# Altium PCB STM32_PCB.PcbDoc
Units mm, origin at the board's own origin, x right, y up, seen from the top; angles counter-clockwise.
Board outline 46.2 x 39.9 mm, 4 copper layers (L1 (Signal), L2 (GND), L3 (GND), L4 (Signal)), stack 1.57 mm thick; 36 components, 27 nets, 174 pads, 66 vias.
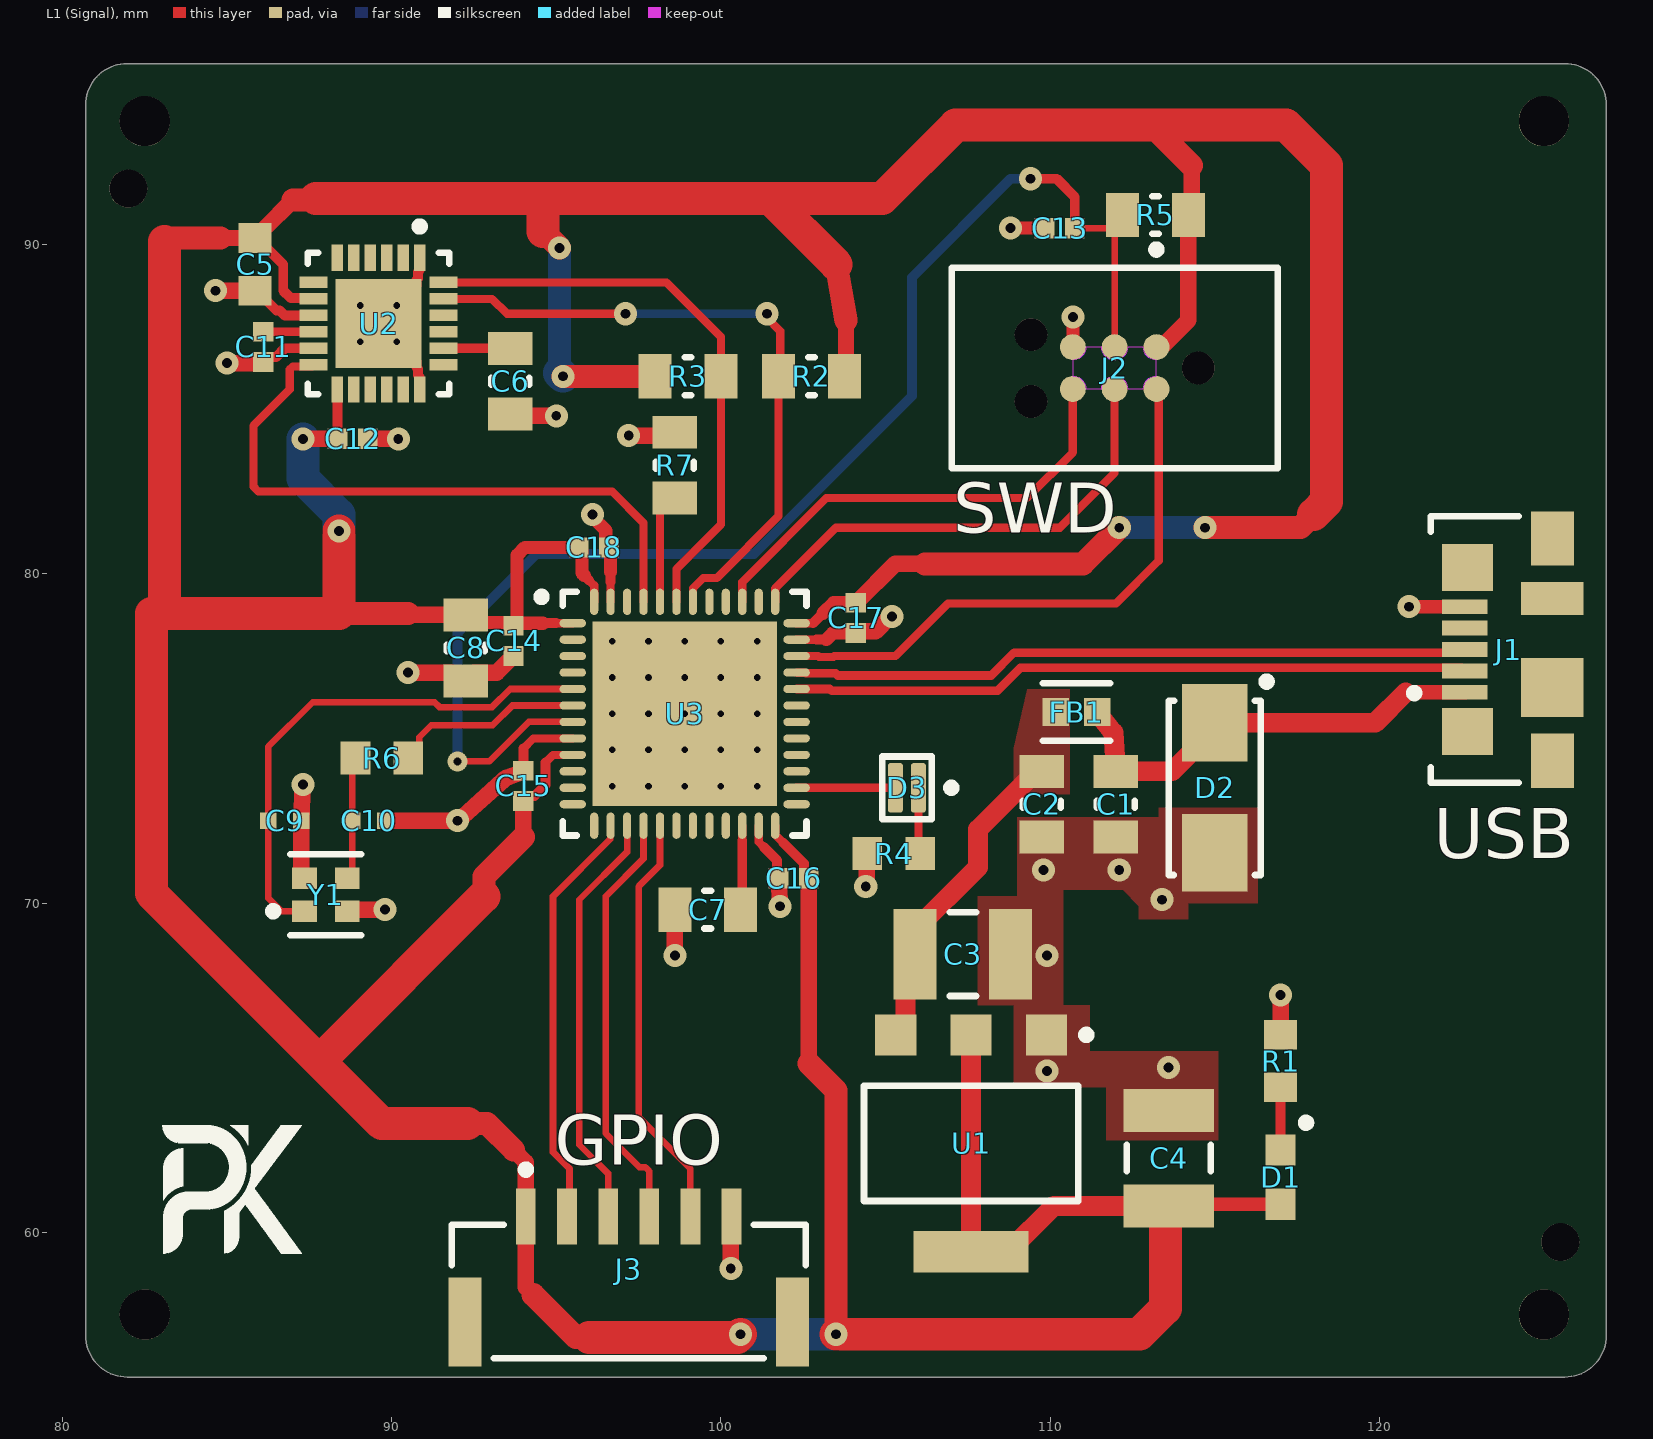
[diagram p0: L1 (Signal) view]
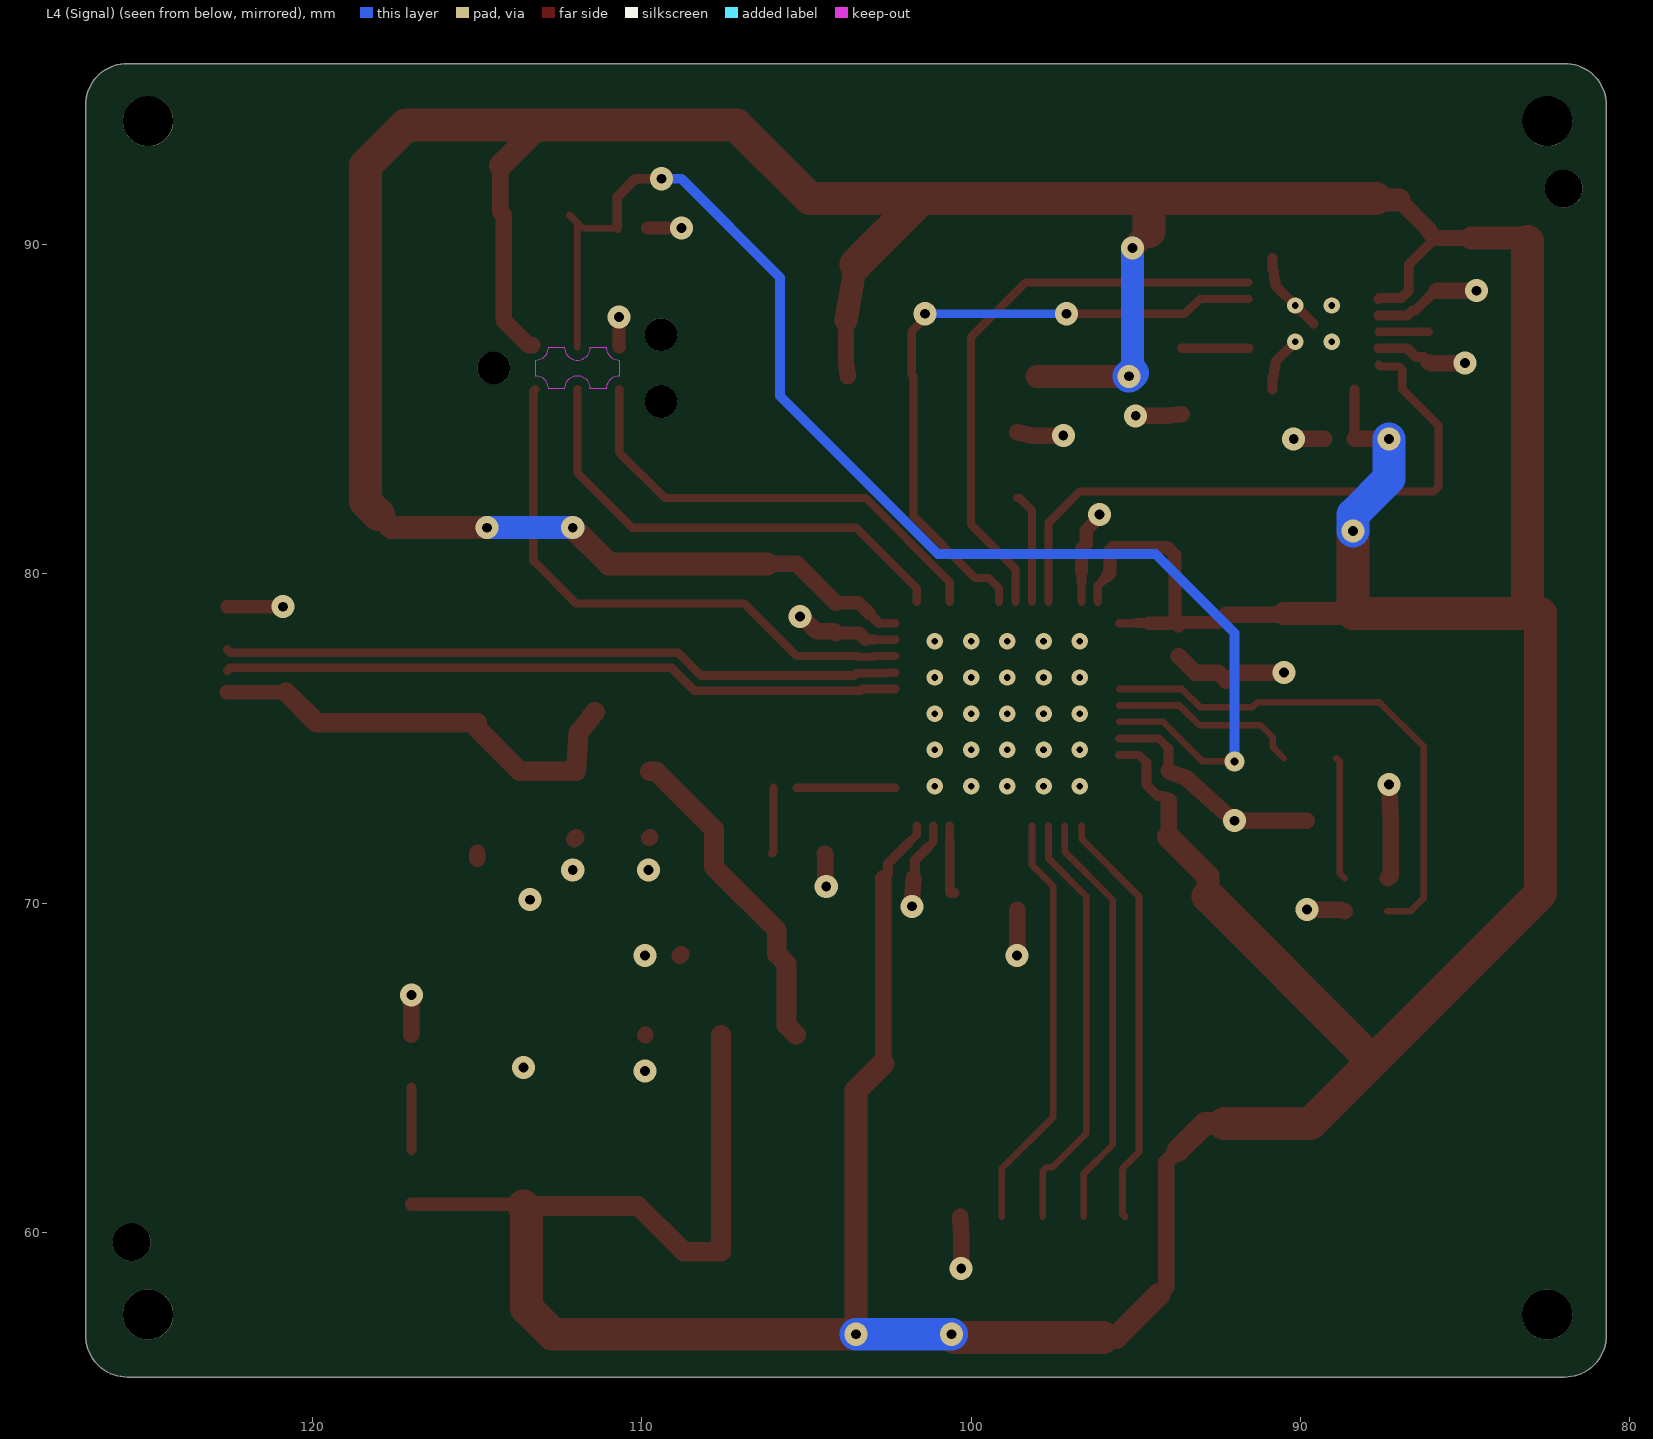
[diagram p1: L4 (Signal) view, seen from below]
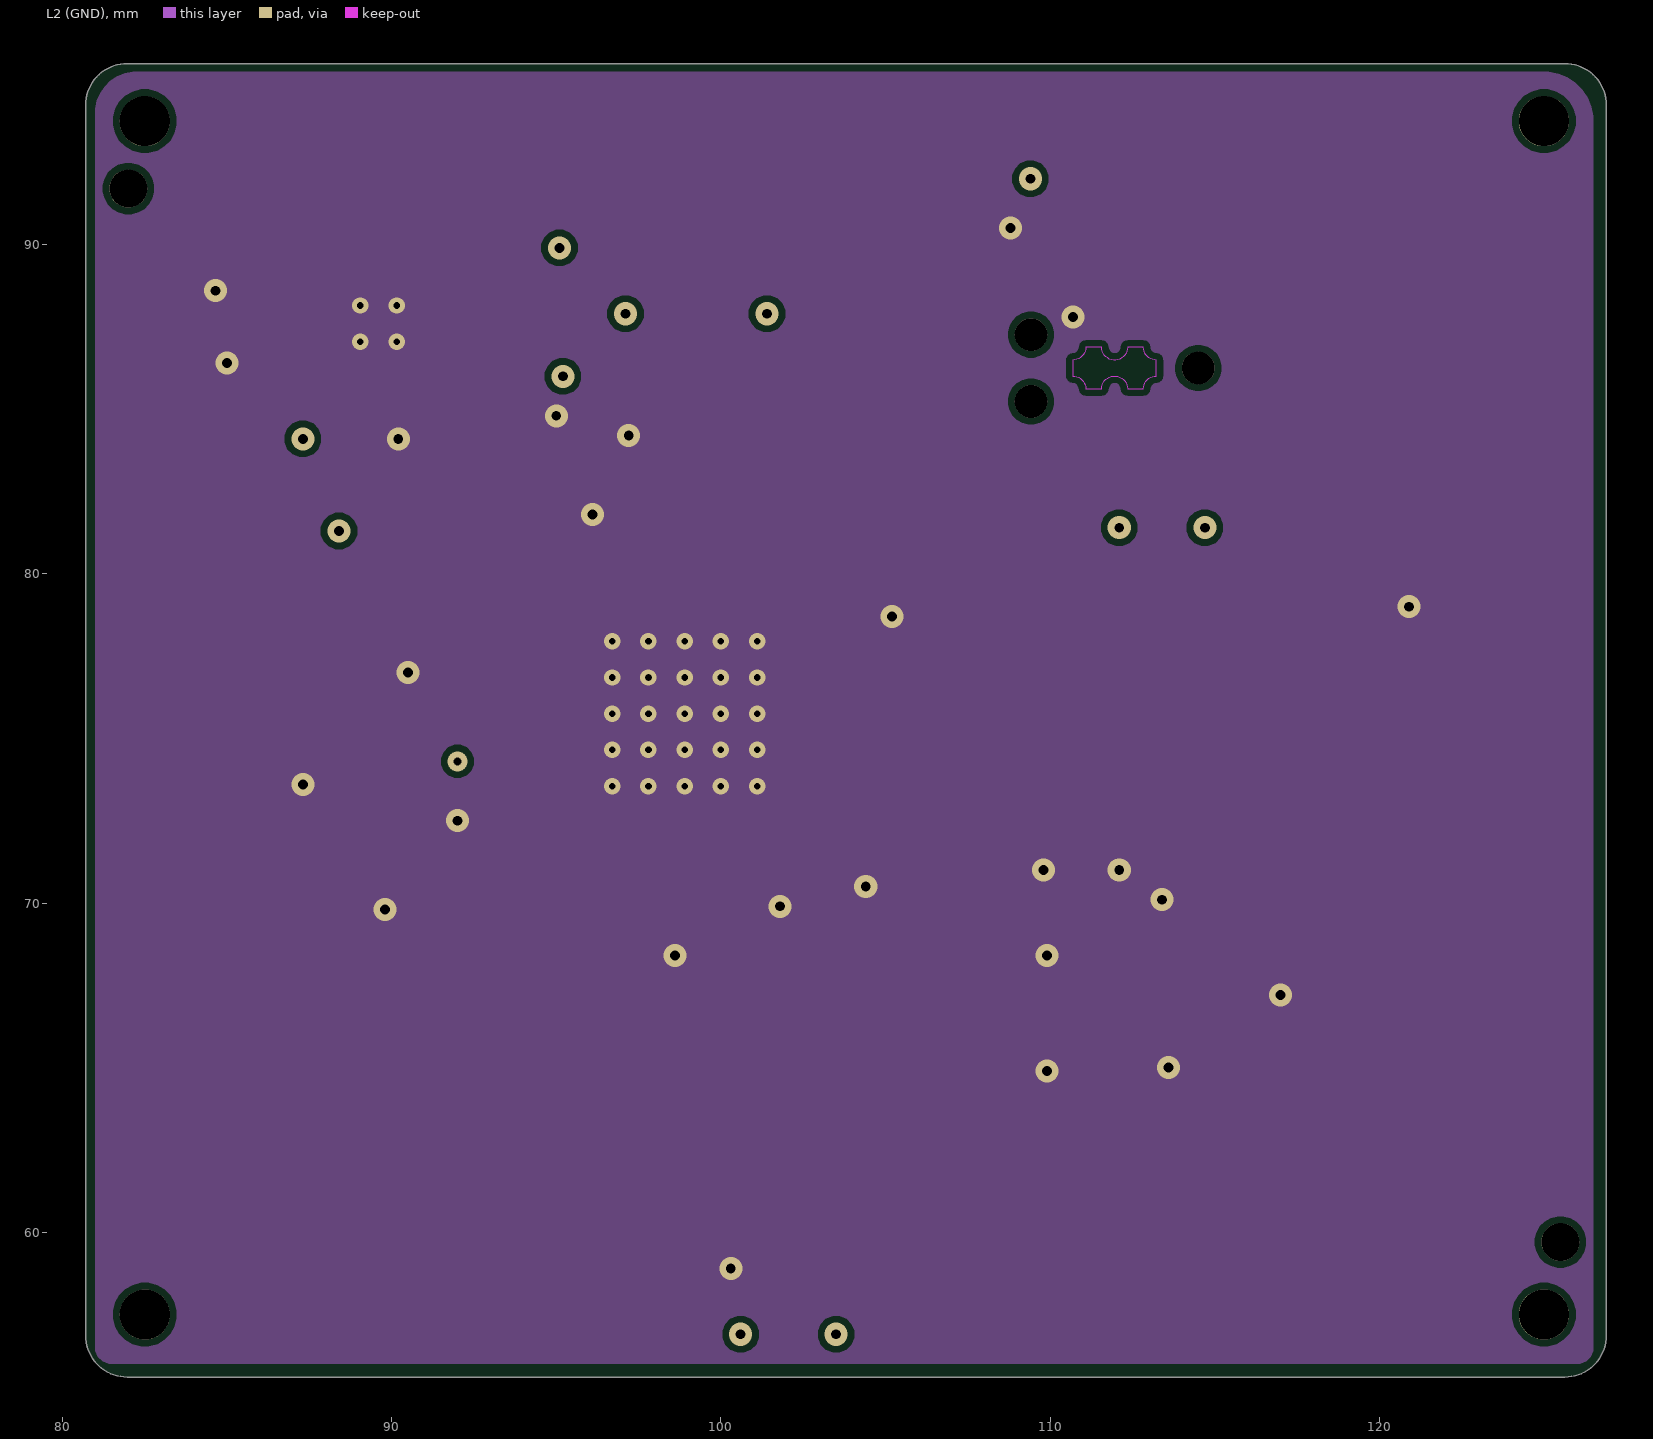
[diagram p2: L2 (GND)]
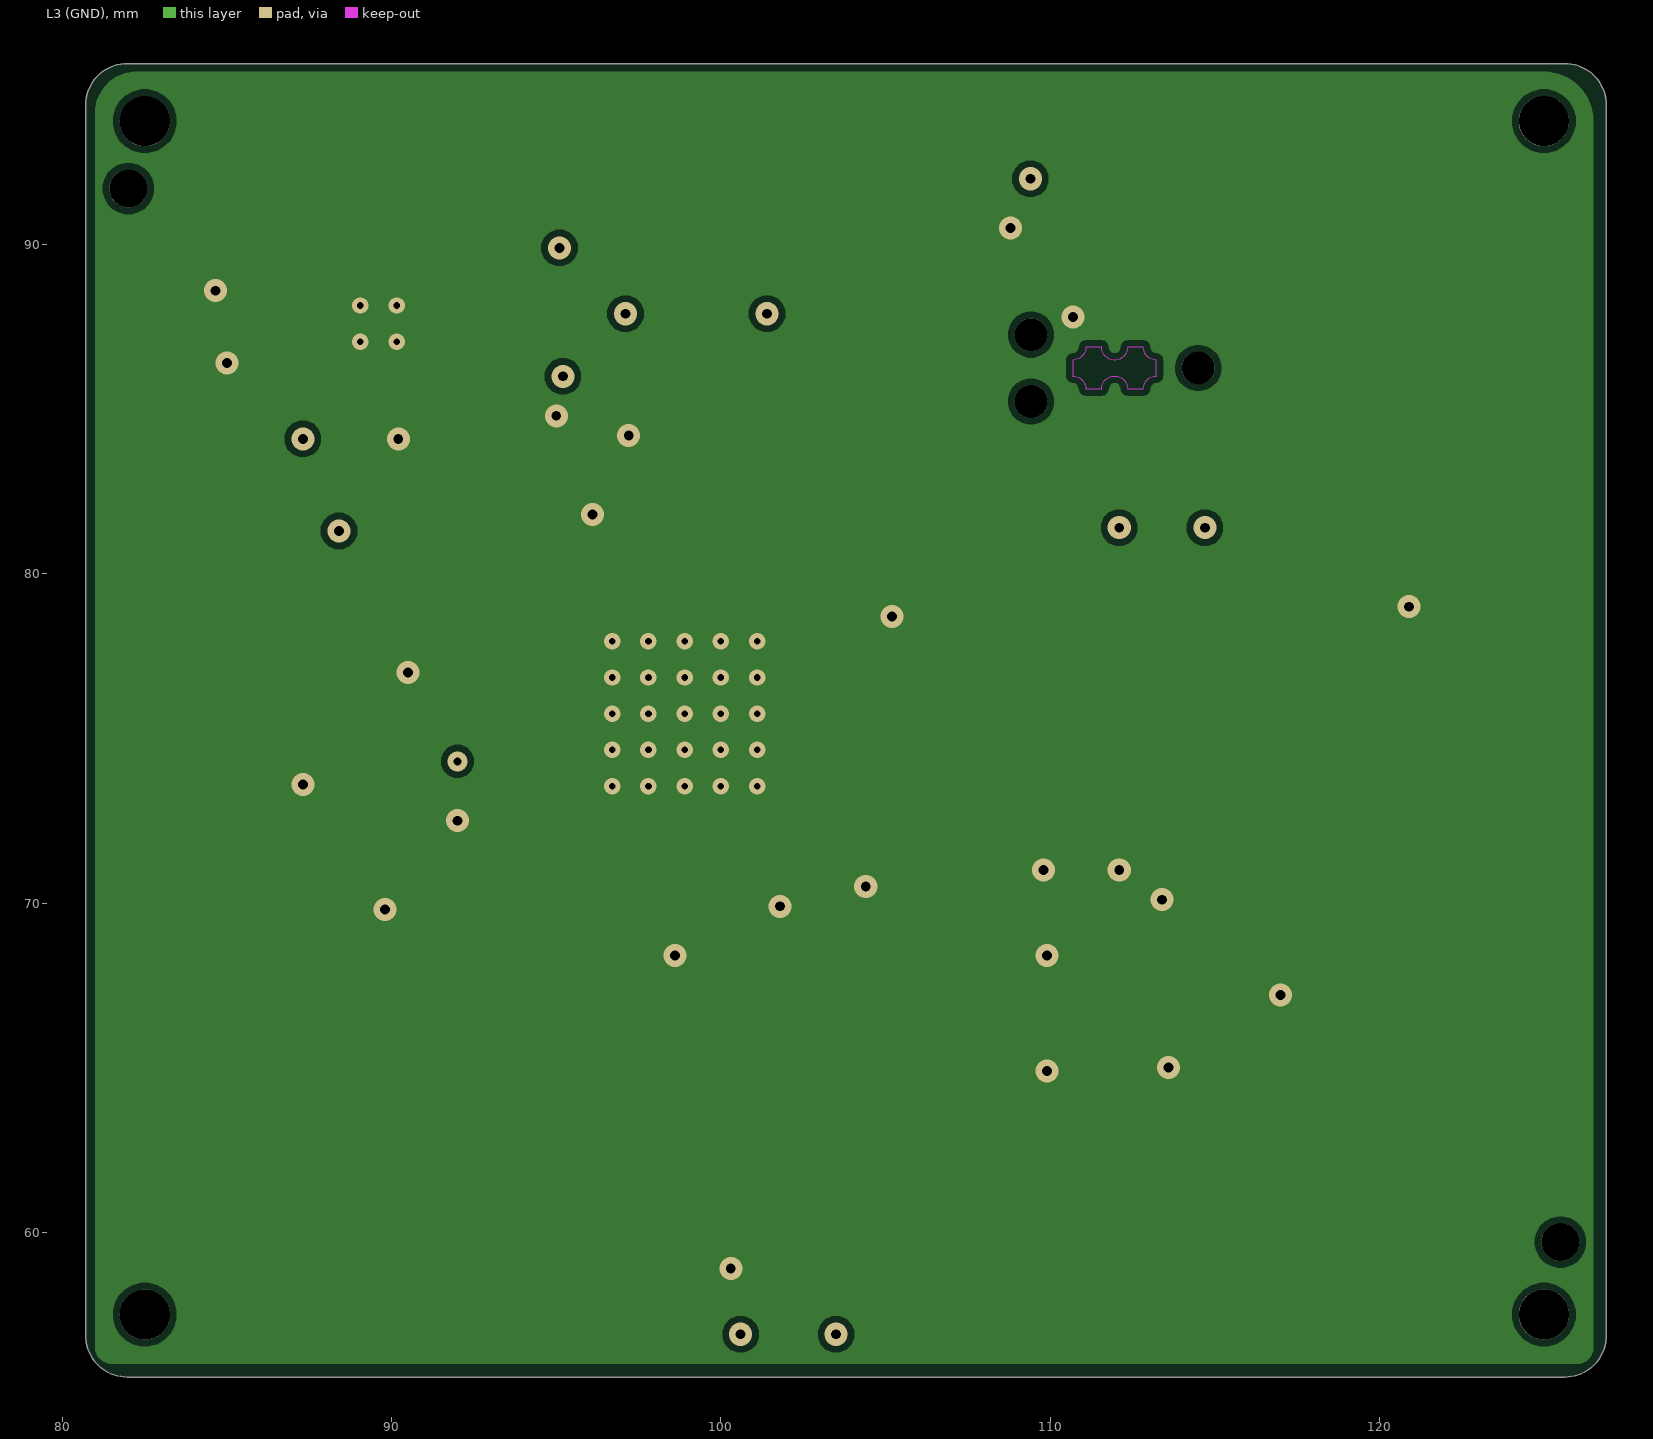
[diagram p3: L3 (GND)]
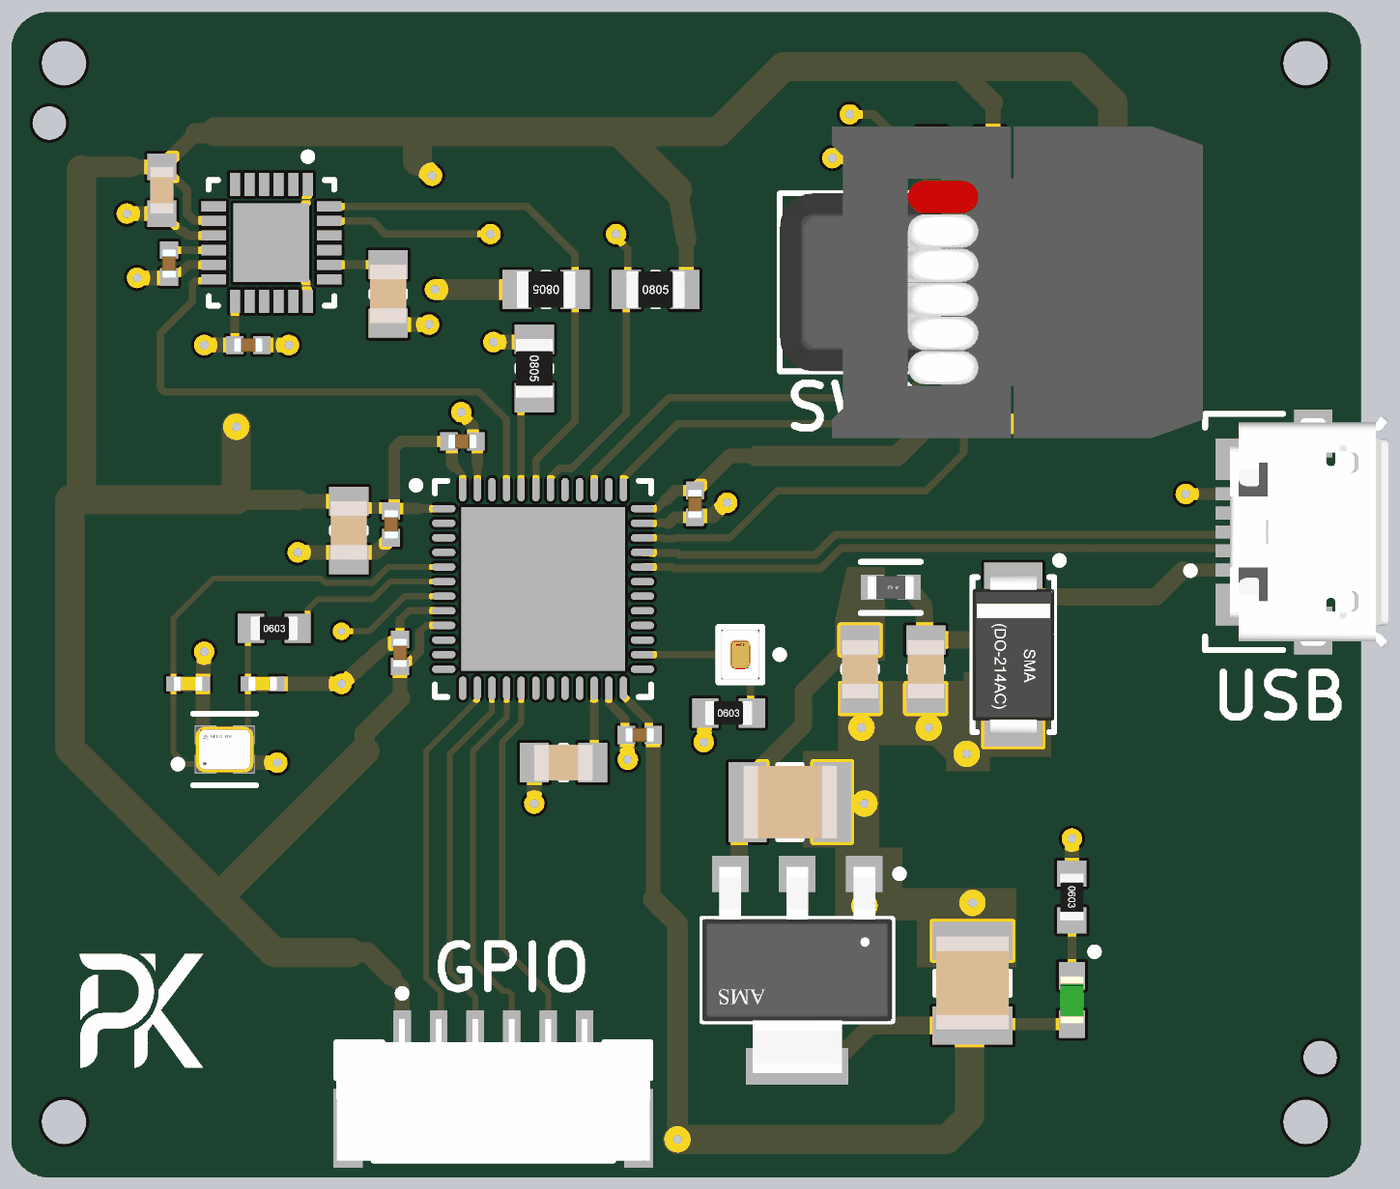
[diagram p4: 3D render of the assembled board from above, using the file's embedded part models]

## Layer stack, top to bottom
Top Solder: solder mask 0.0254, SM-001, Dk 4
L1 (Signal): signal copper 0.035
Dielectric 1: prepreg 0.2, PP-017, Dk 4.6
L2 (GND): signal copper 0.0175
Dielectric 3: core 1.065, Core-039, Dk 4.6
L3 (GND): signal copper 0.0175
Dielectric 5: prepreg 0.2, PP-017, Dk 4.6
L4 (Signal): signal copper 0.035
Bottom Solder: solder mask 0.0254, SM-001, Dk 4

## Board outline
80.7,56.87 80.7,94.23 cw(c81.97,94.23) 81.97,95.5 125.63,95.5 cw(c125.63,94.23) 126.9,94.23 126.9,56.87 cw(c125.63,56.87) 125.63,55.6 81.97,55.6 cw(c81.97,56.87)

## Design rules (kind name [scope] priority, off if disabled: settings)
Clearance [All] p1: gap=0.2 ignorepadtopadclearanceinfootprint=FALSE
DiffPairsRouting [All] p1: maxlimit=0.254 minlimit=0.203 mostfreqgap=0.254 toplayer_maxgap=0.203 toplayer_prefgap=0.203 toplayer_minwidth=0.26 toplayer_maxwidth=0.26 toplayer_prefwidth=0.26 bottomlayer_maxgap=0.203 bottomlayer_prefgap=0.203 bottomlayer_minwidth=0.26 bottomlayer_maxwidth=0.26 bottomlayer_prefwidth=0.26 impedanceprofiledriven=TRUE impedanceprofileid={00F8BFFB-08A5-4590-A4D0-F1D30C82B912} impedanceprofilevalue=90.000000 maxuncoupledlength=12.7
PolygonConnect [All] p1: connectstyle=Direct reliefconductorwidth=0.254 reliefentries=4 polygonreliefangle="90 Angle" airgapwidth=0.254
RoutingVias [All] p1: holewidth=0.3 width=0.7 viastyle="Through Hole" minholewidth=0.25 minwidth=0.55 maxholewidth=0.4 maxwidth=0.9
SolderMaskExpansion [All] p1: expansion=0.102 istentingtop=FALSE
SupplyNets "Schematic Supply Nets_3" [InNet('VBUS')] p1: voltage=0.000
SupplyNets "Schematic Supply Nets_2" [InNet('+3V3')] p2: voltage=0.000
SupplyNets "Schematic Supply Nets_1" [InNet('+5V')] p3: voltage=0.000
SupplyNets "Schematic Supply Nets" [InNet('GND')] p4: voltage=0.000
UnRoutedNet [All] p1: checkbadconnections=TRUE
Width [All] p1: maxlimit=1 minlimit=0.2 preferedwidth=0.3 minimp=50.000000 maximp=50.000000 favimp=50.000000
28 further rules are at their usual default settings.

## Classes and differential pairs
net class USB_DIFF: USB_D_N USB_D_P
differential pair USB_D: +USB_D_P -USB_D_N

## Components (designator, comment, footprint, x,y, rotation, side; value= is the part's Value field where it differs from the comment)
C1 "CC0805ZRY5V7BB225" C_0805 112,73 r90 top value=2.2µF
C2 "CC0805ZRY5V7BB225" C_0805 109.75,73 r90 top value=2.2µF
C3 "CL32A226KOJNNNE" C_1210 107.35,68.45 r180 top value=22µF
C4 "CL32A226KOJNNNE" C_1210 113.6,62.25 r270 top value=22µF
C5 "CC0603KRX7R9BB103" C_0603 85.85,89.4 r90 top value=10nF
C6 "CC0805JKNP09BN222" C_0805 93.6,85.85 r90 top value=2.2nF
C7 "CC0805ZRY5V7BB225" C_0805 99.6,69.8 r0 top value=2.2µF
C8 "CC0805ZRY5V7BB225" C_0805 92.25,77.75 r90 top value=2.2µF
C9 "885392005106" WCAP-CSRF_0402 86.75,72.5 r180 top value=10pF
C10 "885392005106" WCAP-CSRF_0402 89.3,72.5 r180 top value=10pF
C11 "CL05B104KO5NNNC" CAPC1005X55N 86.1,86.89 r270 top value=100nF
C12 "CL05B104KO5NNNC" CAPC1005X55N 88.81,84.1 r0 top value=100nF
C13 "CL05B104KO5NNNC" CAPC1005X55N 110.29,90.5 r180 top value=100nF
C14 "CL05B104KO5NNNC" CAPC1005X55N 93.7,77.96 r270 top value=100nF
C15 "CL05B104KO5NNNC" CAPC1005X55N 94,73.56 r90 top value=100nF
C16 "CL05B104KO5NNNC" CAPC1005X55N 102.21,70.75 r180 top value=100nF
C17 "CL05B104KO5NNNC" CAPC1005X55N 104.1,78.66 r270 top value=100nF
C18 "CL05B104KO5NNNC" CAPC1005X55N 96.14,80.8 r0 top value=100nF
D1 "FYLS-0603UGC" LED_0603 117,61.675 r90 top value=Green
D2 "SMAJ48CA" SMA 115,73.5 r270 top value=56V
D3 "LXZ1-PD02" FP-LXZ1-PD02-MFG 105.65,73.5 r180 top
FB1 "MMZ1608R121ATA00" FP-MMZ1608-0_8-IPC_C 110.8,75.8 r180 top
J1 "473460001" FP-473460001-MFG 124.91,77.7 r90 top
J2 "TC2030-CTX-NL" FP-TC2030-CTX-NL-MFG 111.96,86.25 r180 top
J3 "SM06B-GHS-TB(LF)(SN)" FP-SM06B-GHS-TB_LF_SN-MFG 97.2,58.2 r0 top
R1 "CR-03FL7----1K" R_0603 117,65.2 r270 top value=1k
R2 "CR-05FL7---2K2" R_0805 102.75,86 r0 top value=2.2k
R3 "CR-05FL7---2K2" R_0805 99,86 r180 top value=2.2k
R4 "CR-03FL7----1K" R_0603 105.25,71.5 r0 top value=1k
R5 "CR-05FL7---10K" R_0805 113.2,90.9 r0 top value=10k
R6 "CR-03JL7----0R" R_0603 89.7,74.4 r0 top value=0
R7 "CR-05FL7---10K" R_0805 98.6,83.3 r270 top value=10k
U1 "AMS1117-3.3" FP-AMS1117-IPC_C 107.6,62.7 r270 top
U2 "MPU-6050" IS-QFN-24_V 89.6,87.6 r270 top
U3 "STM32F411CEU6" STM-UFQFPN48_L 98.9,75.75 r0 top
Y1 "ABM11-20.000MHZ-B7G-T" FP-ABM11-MFG 88,70.25 r0 top

## Footprints (in the part's own frame and the unit in brackets; to place one, negate y for a bottom-side part, rotate by r counter-clockwise, add the part's x,y. Pads: shape width x height; smd on the part's side, far side on the other; paste and mask are expansions set on the pad)
C_0603 [mm] "Chip Resistor, 2-Leads, Body 1,60x0,80mm, IPC Medium Density"
  rect 0.9x1 smd: 1(-0.8,0) 2(0.8,0)
  body extent -0.8,-0.4 0.8,0.4, height 0.77
C_0805 [mm] "Chip Resistor, 2-Leads, Body 2,00x1,25mm, IPC Medium Density"
  rect 1x1.35 smd: 1(-1,0) 2(1,0)
  silkscreen extent -0.1,-0.58 0.1,0.58, body extent -1,-0.62 1,0.63, height 0.58
C_1210 [mm] "Chip Resistor, 2-Leads, Body 3,20x2,50mm, IPC Medium Density"
  rect 1.3x2.75 smd: 1(-1.45,0) 2(1.45,0)
  silkscreen extent -0.4,-1.27 0.4,1.28, body extent -1.6,-1.25 1.6,1.25, height 0.76
CAPC1005X55N [mm]
  rect 0.6x0.62 smd: 1(-0.46,0) 2(0.46,0)
  body extent -0.5,-0.25 0.5,0.25, height 0.55
FP-473460001-MFG [mm]
  rect 0.45x1.38 smd paste+0 mask+0: 1(-1.3,2.31) 2(-0.65,2.31) 3(0,2.31) 4(0.65,2.31) 5(1.3,2.31)
  rect 1.425x1.55 smd paste+0 mask+0: 6(-2.488,2.225) 7(2.488,2.225)
  rect 1.65x1.3 smd paste+0 mask+0: 8(-3.375,-0.35) 11(3.375,-0.35)
  rect 1.8x1.9 smd paste+0 mask+0: 9(-1.15,-0.35)
  rect 1x1.9 smd paste+0 mask+0: 10(1.55,-0.35)
  silkscreen extent -4.05,0.67 4.05,3.97, body extent -4.3,-2.48 4.3,3.45, height 0.25
FP-ABM11-MFG [mm]
  rect 0.75x0.65 smd paste+0 mask+0: 1(-0.65,-0.5) 2(0.65,-0.5) 3(0.65,0.5) 4(-0.65,0.5)
  silkscreen extent -1.72,-1.22 1.07,1.22, body extent -1.17,-0.97 1.17,0.97, height 0.25
FP-AMS1117-IPC_C [mm]
  rect 1.25x1.25 smd paste+0 mask+0: 1(-3.295,2.29) 2(-3.295,0) 3(-3.295,-2.29)
  rect 1.25x3.5 smd paste+0 mask+0: 4(3.295,0)
  silkscreen extent -3.42,-3.25 1.75,3.63, body extent -3.9,-3.35 3.9,3.35, height 0.25
FP-LXZ1-PD02-MFG [mm]
  rrect33% 0.45x1.5 smd paste-1000 mask+0: 1(-0.35,0) 2(0.35,0)
  silkscreen extent -1.48,-0.95 0.75,0.95, body extent -0.75,-0.95 0.75,0.95, height 0.25
FP-MMZ1608-0_8-IPC_C [mm]
  rect 0.806x0.858 smd paste+0 mask+0: 1(-0.626,0) 2(0.626,0)
  silkscreen extent -1.03,-0.87 1.03,0.87, body extent -1.13,-0.58 1.13,0.58, height 0.25
FP-SM06B-GHS-TB_LF_SN-MFG [mm]
  rect 0.6x1.7 smd paste+0 mask+0: 1(-3.125,2.275) 2(-1.875,2.275) 3(-0.625,2.275) 4(0.625,2.275) 5(1.875,2.275) 6(3.125,2.275)
  rect 1x2.7 smd paste+0 mask+0: 7(-4.975,-0.925) 8(4.975,-0.925)
  silkscreen extent -5.38,-2.02 5.38,3.82, body extent -5.58,-2.37 5.58,3.22, height 0.25
FP-TC2030-CTX-NL-MFG [mil]
  round 30.98 smd paste-39370.1 mask+0: 1(-50,-25) 2(-50,25) 3(0,-25) 4(0,25) 5(50,-25) 6(50,25)
  round 39.02 hole 39.02 unplated paste-99999 mask+0: ""(-100,0) ""(100,-40) ""(100,40)
  Keep-Out Layer region: -34.51,-25 -15.49,-25 -13.96,-18.28 -9.66,-12.89 -3.45,-9.9 3.45,-9.9 9.66,-12.89 13.96,-18.28 15.49,-25 15.49,-25 34.51,-25 35.69,-19.07 39.05,-14.05 44.07,-10.69 50,-9.51 50,-9.51 50,9.51 44.07,10.69 39.05,14.05 35.69,19.07 34.51,25 34.51,25 15.49,25 13.96,18.28 9.66,12.89 3.45,9.9 -3.45,9.9 -9.66,12.89 -13.96,18.28 -15.49,25 -15.49,25 -34.51,25 -35.69,19.07 -39.05,14.05 -44.07,10.69 -50,9.51 -50,9.51 -50,-9.51 -44.07,-10.69 -39.05,-14.05 -35.69,-19.07 -34.51,-25
  silkscreen extent -195,-147 195,120, body extent -199,-124 199,124, height 10
IS-QFN-24_V [mm] "QFN, 24-Leads, Body 4x4mm, Pitch 0.5mm, Thermal Pad 2.7x2.6mm"
  rect 0.8x0.35 smd: 1(-2,1.25) 2(-2,0.75) 3(-2,0.25) 4(-2,-0.25) 5(-2,-0.75) 6(-2,-1.25) 13(2,-1.25) 14(2,-0.75) 15(2,-0.25) 16(2,0.25) 17(2,0.75) 18(2,1.25)
  rect 0.35x0.85 smd mask+0.102: 7(-1.25,-1.975) 8(-0.75,-1.975) 9(-0.25,-1.975) 10(0.25,-1.975) 11(0.75,-1.975) 12(1.25,-1.975) 19(1.25,1.975) 20(0.75,1.975) 21(0.25,1.975) 22(-0.25,1.975) 23(-0.75,1.975) 24(-1.25,1.975)
  rect 2.7x2.6 smd: 25(0,0)
  silkscreen extent -3.07,-2.15 2.15,2.15, body extent -2,-2 2,2, height 0.95
LED_0603 [mm]
  rect 0.95x0.9 smd: 1(0.825,0) 2(-0.825,0)
  silkscreen extent 1.55,-0.87 1.75,-0.68, body extent -0.8,-0.4 0.8,0.4, height 0.38
R_0603 [mm] "Chip Resistor, 2-Leads, Body 1,60x0,80mm, IPC Medium Density"
  rect 0.9x1 smd: 1(-0.8,0) 2(0.8,0)
  body extent -0.8,-0.4 0.8,0.4, height 0.44
R_0805 [mm] "Chip Resistor, 2-Leads, Body 2,00x1,25mm, IPC Medium Density"
  rect 1x1.35 smd: 1(-1,0) 2(1,0)
  silkscreen extent -0.1,-0.58 0.1,0.58, body extent -1,-0.62 1,0.63, height 0.59
SMA [mm]
  rect 2.35x2 smd: 1(-1.975,0) 2(1.975,0)
  silkscreen extent -3.35,-1.4 2.65,1.7, body extent -2.75,-1.4 2.75,1.4, height 2.6
STM-UFQFPN48_L [mm] "QFN, 48-Leads, Body 7.1x7.1mm, Pitch 0.5mm, Thermal Pad 5.6x5.6mm, IPC High Density"
  oval 0.8x0.25 smd: 1(-3.4,2.75) 2(-3.4,2.25) 3(-3.4,1.75) 4(-3.4,1.25) 5(-3.4,0.75) 6(-3.4,0.25) 7(-3.4,-0.25) 8(-3.4,-0.75) 9(-3.4,-1.25) 10(-3.4,-1.75) 11(-3.4,-2.25) 12(-3.4,-2.75) 25(3.4,-2.75) 26(3.4,-2.25) 27(3.4,-1.75) 28(3.4,-1.25) 29(3.4,-0.75) 30(3.4,-0.25) 31(3.4,0.25) 32(3.4,0.75) 33(3.4,1.25) 34(3.4,1.75) 35(3.4,2.25) 36(3.4,2.75)
  oval 0.25x0.8 smd: 13(-2.75,-3.4) 14(-2.25,-3.4) 15(-1.75,-3.4) 16(-1.25,-3.4) 17(-0.75,-3.4) 18(-0.25,-3.4) 19(0.25,-3.4) 20(0.75,-3.4) 21(1.25,-3.4) 22(1.75,-3.4) 23(2.25,-3.4) 24(2.75,-3.4) 37(2.75,3.4) 38(2.25,3.4) 39(1.75,3.4) 40(1.25,3.4) 41(0.75,3.4) 42(0.25,3.4) 43(-0.25,3.4) 44(-0.75,3.4) 45(-1.25,3.4) 46(-1.75,3.4) 47(-2.25,3.4) 48(-2.75,3.4)
  rect 5.6x5.6 smd: 49(0,0)
  silkscreen extent -4.47,-3.7 3.7,3.7, body extent -3.55,-3.55 3.55,3.55, height 0.6
WCAP-CSRF_0402 [mm] "Radio Frequency MLCC, body 1x0.5mm"
  rect 0.5x0.5 smd: 1(-0.5,0) 2(0.5,0)
  body extent -0.5,-0.25 0.5,0.25, height 0.5

## Part data
C1 C2 C7 C8: library part CMP-001-00541-2, Case/Package=0805, NI Part Number=-, Rating=16V, Tolerance=20%, Design Item ID=CC0805ZRY5V7BB225, Distributor=Lomex, Link=http://lomex.hu/hu/webshop/#/page,0/search,82-01-80/stype,1/sidx,1, NI PEN/DEB=-, Order Number=82-01-80, Part Number=CC0805ZRY5V7BB225, Price (HUF)=2.00, Source=CC0805ZRY5V7BB225.Schlib, Type="Chip Capacitor"
C3 C4: library part CMP-001-00660-2, Case/Package=1210, NI Part Number=-, Rating=16V, Tolerance=10%, Design Item ID=CL32A226KOJNNNE, Distributor=Lomex, Link=http://lomex.hu/hu/webshop/#/page,0/search,82-08-05/stype,1/sidx,1, NI PEN/DEB=-, Order Number=82-08-05, Part Number=CL32A226KOJNNNE, Price (HUF)=2.00, Source=CL32A226KOJNNNE.Schlib, Type="Chip Capacitor"
C5: library part CMP-001-00451-5, Case/Package=0603, NI Part Number=-, Rating=50V, Tolerance=10%, Design Item ID=CC0603KRX7R9BB103, Distributor=Lomex, Link=http://lomex.hu/hu/webshop/#/page,0/search,82-02-45/stype,1/sidx,1, NI PEN/DEB=-, Order Number=82-02-45, Part Number=CC0603KRX7R9BB103, Price (HUF)=2.00, Source=CC0603KRX7R9BB103.Schlib, Type="Chip Capacitor"
C6: library part CMP-001-00483-2, Case/Package=0805, NI Part Number=-, Rating=50V, Tolerance=5%, Design Item ID=CC0805JKNP09BN222, Distributor=Lomex, Link=http://lomex.hu/hu/webshop/#/page,0/search,82-04-70/stype,1/sidx,1, NI PEN/DEB=-, Order Number=82-04-70, Part Number=CC0805JKNP09BN222, Price (HUF)=2.00, Source=CC0805JKNP09BN222.Schlib, Type="Chip Capacitor"
C9 C10: library part CMP-001-00057-1, "WCAP-CSRF Multilayer Ceramic Chip Capacitor High Frequency, size 0402, NP0 Class I, 10pF, 50VDC", Capacitance Tolerance=+/-5%, Case/Package=0402, Insulation Resistance=10GOhm, Manufacturer="Wurth Elektronik", Operating Temperature Max=125°C, Operating Temperature Min=-55°C, Rated Voltage (DC)=50V, Category="Multilayer Ceramic Chip Capacitors", Ceramic Type="NP0 Class I", ComponentLink1Description="Website Link", ComponentLink1URL=https://www.we-online.com/redexpert/article/885392005106?ad, ComponentLink2Description="Datasheet Link", ComponentLink2URL=https://www.we-online.com/redexpert/spec/885392005106?ad, Design Item ID=885392005106, Height=0.5mm, Length=1mm, Manufacturer Part Number=885392005106, Match Code=WCAP-CSRF, Mount="Surface Mount", Packaging="Tape and Reel", Q Factor=600, Source=WCAP-CSRF.SchLib, Technical Reference=NP00402100J050DFCT1R000, Width=0.5mm
C11 C12 C13 C14 C15 C16 C17 C18: library part CMP-001-00022-1, "Multilayer Ceramic Capacitor, 0.1 uF, 16 V, ï¿½ 10%, X7R, 0402 [1005 Metric]", Case Code (Imperial)=0402, Case Code (Metric)=1005, Dielectric=X7R, Manufacturer_Name=SAMSUNG, Max Operating Temperature=125°C, Min Operating Temperature=-55°C, Mouser Part Number=187-CL05B104KO5NNNC, Package Quantity=1, Tolerance=10%, Voltage=16V, Case/Package=0402, Construction=Flat, Datasheet Link=https://datasheet.datasheetarchive.com/originals/distributors/Datasheets-DGA10/2408147.pdf, Depth=0.5mm, Design Item ID=CL05A105KO5NNNC, Geometry.Height=0.55mm, Height=0.5mm, Lead Free="Lead Free", Length=1mm, Manufacturer_Part_Number=CL05B104KO5NNNC, Material=Ceramic, Mounting Technology="Surface Mount", Mouser Price/Stock=https://www.mouser.co.uk/ProductDetail/Samsung-Electro-Mechanics/CL05B104KO5NNNC?qs=hqM3L16%252BxlfT2SKOuAUq6Q%3D%3D, Order Number=82-08-44, Packaging="Tape and Reel", Radiation Hardening=No, RoHS Compliant=Yes, Series=CL, Source=CL05A105KO5NNNC.SchLib, Thickness=0.022inch, Voltage Rating=16V, Voltage Rating (DC)=16V, Width=0.02inch
D1: library part CMP-004-00082-2, Case/Package=0603, NI Part Number=-, Rating=30mA, Design Item ID=FYLS-0603UGC, Distributor=Lomex, Link=http://lomex.hu/hu/webshop/#/page,0/stype,1/sidx,10/instock,0/search,95-03-08, NI PEN/DEB=-, Note=40mcd, Order Number=95-03-08, Part Number=FYLS-0603UGC, Price (HUF)=10, Source=FYLS-0603UGC.Schlib, Type=LED
D2: library part CMP-004-00087-1, "bidirectional", Case/Package=SMA, NI Part Number=-, Rating=400W, Design Item ID=SMAJ48CA, Distributor=Lomex, Link=https://lomex.hu/hu/webshop/#/search,96-04-63/stype,1, NI PEN/DEB=-, Order Number=96-04-63, Part Number=SMAJ48CA, Price (HUF)=20, Type="Transient Voltage Suppressor"
D3: library part CMP-224022-000002-1, "LUXEON Z High Power SMT LED Emitter Red Lambertian 500mA 2.15 V", Lead Free="Lead Free", RoHS Compliant=Yes
FB1: library part CMP-08257-000251-1, "Signal Line Ferrite Bead 120Ω  @ 100MHz 500mA DCR 180mΩ SMD 0603", Case Code (Imperial)=0603, Case Code (Metric)=1608, Current Rating=500mA, DC Resistance (DCR)=180mR, Package Quantity=4000, Tolerance=25%, Case/Package=0603, Core Material=Ferrite, Height=0.037inch, Impedance=120R, Length=0.063inch, Max DC Current=500mA, Mount="Surface Mount", Packaging="Tape and Reel", REACH SVHC="No SVHC", RoHS Compliant=Yes, Series=MMZ, Width=0.031inch
J1: library part CMP-2000-05246-2, "CONN RCPT USB2.0 MICRO B SMD R/A", Current Rating=1.8A, Manufacturer=Molex, Package=0, Temperature="-30°C to +85°C", Temperature Range High=+85°C, Temperature Range Low=-30°C, Voltage Rating=30V, Automotive=No, Category=Conn, ComponentLink2Description=Datasheet, ComponentLink2URL=https://www.molex.com/webdocs/datasheets/pdf/en-us/0473460001_IO_CONNECTORS.pdf, Conn Orientation="Right Angle", Contact Material=Gold,Nickel, Device Class L1=Connectors, Device Class L2="USB Connectors", Device Class L3=unset, Digikey Description="CONN RCPT USB2.0 MICRO B SMD R/A", Footprint Url=https://www.molex.com/pdm_docs/sd/473460001_sd.pdf, Height=2.945mm, Is Female=yes, Lead Free=Yes, Manufacturer Part Number=473460001, Number Of Contacts=5, Octopart=https://octopart.com/47346-0001-molex-7164928, Pitch=0.65mm, RoHS=TRUE, Shielding=true, Usb Standard="USB 2.0"
J2: library part CMP-205963-000001-1, "6-Pin “No legs” TC2030 Plug-of-Nails™ Cable for use with ARM Cortex processors"
J3: library part CMP-17439-000061-1, "CONN HEADER SMD R/A 6POS 1.25MM", Color=Natural, Contact Resistance=50mR, Current Rating=1A, Housing Color=Beige, Max Operating Temperature=85°C, Max Voltage Rating (AC)=50V, Min Operating Temperature=-25°C, Connector Type="Outer Shroud Contact", Contact Material=Bronze, Contact Plating=Tin, Depth=4.05mm, Fastening Type=Ramp, Housing Material=Polyamide, Lead Free="Lead Free", Length=10.75mm, Max Current Rating=1A, Mount="Surface Mount", Number Of Contacts=6, Number of Positions=6, Number of Rows=1, Orientation="Right Angle", Packaging="Tape and Reel", Pitch=1.25mm, Termination=Solder, Voltage Rating=50V
R1 R4: library part CMP-009-00002-5, Case/Package=0603, NI Part Number=713776-01, Rating=0.1W, Tolerance=1%, Design Item ID=CR-03FL7----1K, Distributor=Lomex, Link=http://lomex.hu/hu/webshop/#/page,0/search,80-11-59/stype,1/sidx,1, NI PEN/DEB=DEB, Order Number=80-11-59, Part Number=CR-03FL7----1K, Price (HUF)=0.80, Source=CR-03FL7----1K.Schlib, Type="Chip Resistor"
R2 R3: library part CMP-009-00296-3, Case/Package=0805, NI Part Number=-, Rating=0.125W, Tolerance=1%, Design Item ID=CR-05FL7---2K2, Distributor=Lomex, Link=http://lomex.hu/hu/webshop/#/page,0/search,80-10-90/stype,1/sidx,1, NI PEN/DEB=-, Order Number=80-10-90, Part Number=CR-05FL7---2K2, Price (HUF)=0.80, Source=CR-05FL7---2K2.Schlib, Type="Chip Resistor"
R5 R7: library part CMP-009-00315-3, Case/Package=0805, NI Part Number=-, Rating=0.125W, Tolerance=1%, Design Item ID=CR-05FL7---10K, Distributor=Lomex, Link=http://lomex.hu/hu/webshop/#/page,0/search,80-10-98/stype,1/sidx,1, NI PEN/DEB=-, Order Number=80-10-98, Part Number=CR-05FL7---10K, Price (HUF)=0.80, Source=CR-05FL7---10K.Schlib, Type="Chip Resistor"
R6: library part CMP-009-00264-5, Case/Package=0603, NI Part Number=611560-01, Rating=1A, Tolerance=5%, Design Item ID=CR-03JL7----0R, Distributor=Lomex, Link=http://lomex.hu/hu/webshop/#/page,0/search,81-10-01/stype,1/sidx,1, NI PEN/DEB=DEB, Order Number=81-10-01, Part Number=CR-03JL7----0R, Price (HUF)=0.80, Source=CR-03JL7----0R.Schlib, Type="Chip Resistor"
U1: library part CMP-209535-000001-1, "LDO Voltage Regulators 1A, 3.3V", Dropout Voltage=1.1V, Manufacturer="Advanced Monolithic Systems", Max Junction Temp=+125°C, Max Power Dissipation=1.2W, Max Supply Voltage=15V, Nominal Supply Current=5mA, Output Current=1A, Output Voltage=3.3V, Package=AMS1117, Temperature="-40°C to +125°C", Temperature Range Low=-40°C, Automotive=No, Category=IC, ComponentLink2Description=Datasheet, ComponentLink2URL=http://www.advanced-monolithic.com/pdf/ds1117.pdf, Device Class L1="Integrated Circuits (ICs)", Device Class L2="Power Management ICs", Device Class L3="Voltage Regulators - Linear", Height=1.8mm, Ipc Land Pattern Name=SOT229P700X180-4, Lead Free=Yes, Manufacturer Part Number=AMS1117-3.3, Number Of Outputs=1, Octopart=https://octopart.com/ams1117-3.3-advanced+monolithic+systems-25899300, Output Type=Fixed, RoHS=TRUE, Standoff Height=0.64mm, Temperature Range High=+125°C
U2: library part CMP-1753-00002-2, "3-Axis Gyroscope, Accelerometer and a Digital Motion Processor(TM) (DMP), 2.375 to 3.46 V, -40 to 85 degC, 24-Pin QFN, RoHS, Tape and Reel", Manufacturer=InvenSense, Standard Package=5,000, Category=Sensors,Transducers, Datasheet URL=http://datasheet.octopart.com/MPU-6050-InvenSense-datasheet-14421344.pdf, Datasheet Version="Rev. 3.3, 05/2012", Dynamic Catalog=MPU-6000™Series, Family=Multifunction, Featured Product=MPU-60506-Axis,IntegratedI²CSolution, Manufacturer URL=http://www.invensense.com/, Online Catalog=MPU-6000™Series, Other Names="1428-1007-2 / MPU6050", Output Type=Digital, Sensor Type=MotionTracking, Unit PriceUSD=Digital
U3: library part CMP-0243-00165-1, "ARM Cortex-M4 32-bit MCU+FPU, 512 KB Flash, 128 KB RAM, 36 I/Os, 48-Pin UFQFPN, -40 to 85 degC, Tray", I/Os (High Current)=36, Operating Frequency(F) (Processor speed) (MHz)=100, Package Description=UFQFPN48, Package Reference="48-Pin Ultra Thin Fine Pitch Quad Flat No-Lead, 7 x 7 x 0.6 mm Body, 0.5 mm Pitch, Exposed Pad", Supply Voltage(Vcc) min (V)=1.7, ComponentLink1Description="Manufacturer URL", ComponentLink1URL=http://www.st.com/, ComponentLink2Description=Datasheet, ComponentLink2URL=http://www.st.com/st-web-ui/static/active/en/resource/technical/document/datasheet/DM00115249.pdf, Core="ARM Cortex-M4", DatasheetVersion="Rev. 6", FLASH Size (Prog) (kB)=512, Internal RAM Size (kB)=128, Mounting Technology="Surface Mount", Packing=Tray
Y1: library part CMP-27762-009397-1, "Crystal 20MHz ±15ppm 10pF SMD-4 2mm x 1.6mm", Case/Package=SMD/SMT, ESR (Equivalent Series Resistance)=120R, Frequency=20MHz, Frequency Stability=15ppm, Load Capacitance=10pF, Max Operating Temperature=70°C, Min Operating Temperature=-20°C, Package Quantity=1000, Frequency Tolerance=15ppm, Height=0.023inch, Length=0.079inch, Mount="Surface Mount", Number of Pins=4, Packaging="Tape and Reel", Series=ABM11, Series Resistance=120R, Termination=SMD/SMT, Tolerance=15ppm, Width=0.063inch

## Free pads (board coordinates)
  round 1.524 hole 1.524 unplated: MH(82.5,57.5) MH(82.5,93.75) MH(125,57.5) MH(125,93.75)
  round 1.152 hole 1.152 unplated: TH(82,91.7) TH(125.5,59.7)

## Via types
v1: diameter 0.7, hole 0.3, L1 (Signal) to L4 (Signal), 36 vias
v2: diameter 0.5, hole 0.2, L1 (Signal) to L4 (Signal), 29 vias
v3: diameter 0.6, hole 0.25, L1 (Signal) to L4 (Signal), 1 vias

## Nets (pads, with @x,y where several pads share a name; then routed paths per layer and width w, separated by ;. In a path a pad name is that pad's centre, name@x,y a point inside that pad or via, vN(x,y) a via of type N, cw(c..) or ccw(c..) an arc to the next point about the centre after c; other vN are vias at no path point)
+3V3: C4.2 C5.2 C8.2 C12.1 C14.1 C15.1 C16.1 C17.1 C18.1 D1.2 J2.1 J3.1 R2.2 R3.2 R5.2 U1.2 U1.4 U2.8 U2.13 U3.1 U3.9 U3.24 U3.36 U3.48 | length 225.5
  L1 (Signal) w0.25: 94.672,74.272 94.9,74.5 U3.9 ; 95,78.5 U3.1 ; 96,79.8 96.15,79.65 U3.48 ; U3.24 101.65,72.075 101.9,71.825 ; U3.36 102.8,78.5
  L1 (Signal) w0.3: C5.2@85.9,90.2 86.707,89.393 86.707,88.6 86.932,88.375 87.6,88.375 U2.8 ; C12.1 U2.13 ; C15.1 94.15,73.25 94.335,73.25 94.672,73.587 94.672,74.272 ; 94.6,78.5 95,78.5 ; 95.85,79.95 96,79.8 ; 101.9,71.825 102.52,71.205 102.52,70.9 C16.1 ; 102.8,78.5 103.1,78.8
  L1 (Signal) w0.4: C8.2 92.48,78.52 93.59,78.52 C14.1@93.69,78.42 ; 94.6,78.5 C14.1@93.79,78.5 ; 95.85,79.95 95.78,80.02 95.78,80.7 C18.1 94.044,80.8 93.81,80.566 93.81,78.52 C14.1@93.79,78.5 ; 103.1,78.8 103.42,79.12 C17.1 ; C4.2 113.65,60.85 D1.2 ; C14.1@93.79,78.5 93.78,78.5 C14.1 93.71,78.42 C14.1@93.79,78.5
  L1 (Signal) w0.5: 84.8,90.2 C5.2 85.9,90.2 86.1,90.4 86.1,90.45 87.004,91.354 ; v1(87.3,84.1) C12.1 ; 90.5,78.8 90.5,78.75 C8.2 ; 93.7,62.5 94.075,62.125 J3.1 94.075,58.325 94.3,58.1 ; 94,72 C15.1 ; 102.67,65.13 C16.1 ; R2.2 103.8,86.425 103.8,87.7 ; C17.1 104.11,79.12 105.29,80.3 106.2,80.3 ; J2.1@113.322,86.939 113.439,86.939 114.2,87.7 R5.2 114.3,91 114.3,92.4
  L1 (Signal) w0.6: U1.2 U1.4 108.725,59.405 110.12,60.8 C4.2
  L1 (Signal) w0.7: 83.1,90.1 83.2,90.2 84.8,90.2 ; 87.004,91.354 87.654,91.354 ; 88.4,78.8 90.5,78.8 ; 92.3,63.3 92.9,63.3 93.7,62.5 ; 92.8,70.2 92.8,70.8 94,72 ; 94.3,58.1 95.6,56.8 96,56.8 ; 94.6,90.4 v1(95.1,89.9) ; v1(95.2,86) R3.2 ; 102.67,65.13 103.5,64.3 v1(103.5,56.9) ; 103.5,89.4 103.8,87.7 ; 106.2,80.3 111,80.3 v1(112.1,81.4) ; 113.068,93.632 114.3,92.4 ; v1(114.7,81.4) 117.6,81.4 118,81.8
  L1 (Signal) w1: 83.1,90.1 83.1,78.8 ; 87.7,91.4 94.6,91.4 ; v1(88.4,81.3) 88.4,78.8 83.1,78.8 ; 92.3,63.3 89.7,63.3 87.65,65.35 ; 92.8,70.2 87.95,65.35 87.65,65.35 ; 94.6,90.4 94.6,91.4 ; 96,56.8 100.5,56.8 v1(100.6,56.9) ; v1(103.5,56.9) 112.714,56.9 113.5,57.686 113.5,60.65 C4.2 ; 103.5,89.4 101.5,91.4 ; 118,81.8 118.4,82.2 118.4,92.4 117.168,93.632 113.068,93.632 107.132,93.632 104.9,91.4 101.5,91.4 ; 83.1,78.8 82.7,78.8 82.7,70.3 87.65,65.35 ; 94.6,91.4 101.5,91.4
  L4 (Signal) w0.7: v1@95.1,86.1 v1(95.1,89.9) ; v1(112.1,81.4) v1(114.7,81.4)
  L4 (Signal) w1: v1(87.3,84.1) 87.3,82.9 88.4,81.8 v1(88.4,81.3) ; v1@95.1,86.1 v1(95.2,86) ; v1(100.6,56.9) v1(103.5,56.9)
+5V: C2.2 C3.2 FB1.2 U1.3 | length 9.9
  L1 (Signal) w0.6: U1.3 105.605,66.29 105.605,68.155 C3.2 105.9,69.175 107.812,71.088 107.812,72.237 109.575,74 C2.2
CRSTL_IN: C10.2 R6.1 Y1.3 | length 3.8
  L1 (Signal) w0.2: Y1.3 88.8,70.9 C10.2 88.8,74.3 R6.1
GND: C1.1 C2.1 C3.1 C4.1 C5.1 C6.1 C7.1 C8.1 C9.1 C10.1 C11.2 C12.2 C13.2 C14.2 C15.2 C16.2 C17.2 C18.2 D2.2 J1.5 J2.5 J3.6 R1.1 R4.1 R7.1 U1.1 U2.1 U2.9 U2.11 U2.18 U2.25 U3.8 U3.23 U3.35 U3.47 U3.49 Y1.2 Y1.4 | length 46.8
  L1 (Signal) w0.25: 94,74.7 94.3,75 U3.8 ; U3.47 96.65,79.75 ; U3.23 101.15,71.85 101.3,71.7 ; U3.35 102.9,78
  L1 (Signal) w0.3: C5.1@85.9,88.6 86.5,88 86.6,88 86.75,87.85 U2.9 ; C11.2 86.25,86.58 86.48,86.58 86.75,86.85 U2.11 ; U2.25 v2(90.15,88.15) 90.75,88.75 90.75,88.926 90.8,88.976 90.8,89.17 90.85,89.22 U2.1 ; v2(90.15,87.05) 90.75,86.45 90.75,86.274 90.8,86.224 90.8,86.03 90.85,85.98 U2.18 ; C15.2 94,74.7 ; 96.65,79.75 96.65,80.05 ; 101.3,71.7 101.7,71.3 C16.2@101.7,70.75 ; 102.9,78 103.2,78
  L1 (Signal) w0.4: v1(96.1,81.8) 96.1,81.719 96.5,81.319 96.5,80.9 C18.2 96.65,80.75 96.65,80.05 ; 103.2,78 103.4,78.2 C17.2 ; v1(108.8,90.5) C13.2 ; J2.5 110.695,86.89 110.695,87.795 v1(110.7,87.8) ; v1(120.9,79) J1.5
  L1 (Signal) w0.5: v1(84.65,88.6) C5.1 ; v1(85,86.4) 86.04,86.4 C11.2 ; v1(87.3,73.6) C9.1 87.25,70.825 Y1.4 ; Y1.2 88.775,69.8 v1(89.8,69.8) ; C12.2 v1(90.2,84.1) ; C10.1 v1(92,72.5) 92.134,72.602 ccw(c91.832,73) 92.167,72.629 93.388,73.734 cw(c93.69,73.4) 93.536,73.823 93.94,73.97 C15.2 ; v1(90.5,77) 91.825,77 C8.1 92.5,77 93.19,77 93.69,77.5 C14.2 ; C6.1 94.025,84.8 v1(95,84.8) ; v1(97.2,84.2) 98.175,84.2 R7.1 ; v1(98.6,68.4) C7.1 ; v1(100.3,58.9) 100.3,59.875 J3.6 ; C16.2 v1(101.8,69.9) ; C17.2 104.15,78.25 104.696,78.25 105.146,78.7 v1(105.2,78.7) ; v1(104.4,70.5) 104.425,70.525 104.425,71.475 R4.1 ; C3.1 C3.1@108.85,68.4 ; C2.1 C2.1@109.775,71.975 ; U1.1 U1.1@109.895,65.99 ; v1@109.895,64.905 v1(109.9,64.9) ; C1.1 C1.1@112.062,71.938 ; v1(113.4,70.1) v1@113.438,70.138 ; D2.2@115,71.35 D2.2 ; R1.1 v1(117,67.2)
  other v1: 113.6,65 109.9,68.4 109.8,71 112.1,71
  other v2: 96.7,73.55 97.8,73.55 98.9,73.55 100,73.55 101.1,73.55 96.7,74.65 97.8,74.65 98.9,74.65 100,74.65 101.1,74.65 96.7,75.75 97.8,75.75 98.9,75.75 100,75.75 101.1,75.75 96.7,76.85 97.8,76.85 98.9,76.85 100,76.85 101.1,76.85 96.7,77.95 97.8,77.95 98.9,77.95 100,77.95 101.1,77.95 89.05,87.05 89.05,88.15
IMU_CPOUT: C6.2 U2.20 | length 2
  L1 (Signal) w0.3: U2.20 C6.2
IMU_INT: U2.12 U3.45 | length 19.5
  L1 (Signal) w0.25: U2.12 87.575,86.3 86.996,86.3 86.9,86.204 86.9,85.6 85.8,84.5 85.8,82.646 85.946,82.5 96.7,82.5 97.65,81.55 U3.45
IMU_REGOUT: C11.1 U2.10 | length 1.5
  L1 (Signal) w0.25: C11.1 U2.10
IMU_SCL: R2.1 U2.23 U3.42 | length 20.3
  L1 (Signal) w0.25: U2.23 93.05,88.35 93.5,87.9 v1(97.1,87.9) ; U3.42 99.15,79.561 99.464,79.875 99.875,79.875 101.75,81.75 R2.1 101.8,86.05 101.8,87.378 101.4,87.778 v1(101.4,87.9)
  L4 (Signal) w0.25: v1(97.1,87.9) v1(101.4,87.9)
IMU_SDA: R3.1 U2.24 U3.43 | length 17.7
  L1 (Signal) w0.25: U2.24 98.35,88.85 100,87.2 R3.1 100,81.5 98.65,80.15 U3.43
LED_CATH: D1.1 R1.2 | length 1.9
  L1 (Signal) w0.3: D1.1 R1.2
MCU_BOOT0: R7.2 U3.44 | length 3.4
  L1 (Signal) w0.25: U3.44 98.15,81.925 98.525,82.3 R7.2
MCU_LEDa: D3.2 U3.26 | length 3
  L1 (Signal) w0.25: U3.26 D3.2
MCU_LEDk: D3.1 R4.2 | length 2
  L1 (Signal) w0.25: D3.1 106,71.55 R4.2
MCU_NRST: C13.1 J2.3 R5.1 U3.7 | length 41
  L1 (Signal) w0.2: v3(92,74.3) 92.964,74.3 94.164,75.5 U3.7 ; C13.1 111.8,90.5 R5.1@111.96,90.66 ; J2.3 R5.1@111.96,90.66 ; R5.1 R5.1@111.96,90.66
  L1 (Signal) w0.3: v1(109.4,92) 110.2,92 110.75,91.45 C13.1
  L4 (Signal) w0.3: v3(92,74.3) 92,78.2 94.4,80.6 101,80.6 105.8,85.4 105.8,89 108.8,92 v1(109.4,92)
MCU_OSC_IN: C9.2 U3.5 Y1.1 | length 16
  L1 (Signal) w0.2: Y1.1 86.65,69.75 86.25,70.15 C9.2 86.25,74.75 87.6,76.1 91.301,76.1 91.451,75.95 92.519,75.95 93.049,75.95 93.599,76.5 U3.5
MCU_OSC_OUT: R6.2 U3.6 | length 5.8
  L1 (Signal) w0.2: R6.2 90.837,74.737 90.837,75.037 91.2,75.4 93.065,75.4 93.665,76 U3.6
MCU_PA4: J3.2 U3.14 | length 12.8
  L1 (Signal) w0.2: J3.2 95.4,60.55 95.4,61.934 94.9,62.434 94.9,70.2 96.64,71.94 96.64,72.34 U3.14
MCU_PA5: J3.3 U3.15 | length 12.8
  L1 (Signal) w0.2: J3.3 96.575,61.783 95.7,62.658 95.7,70.1 97.15,71.55 U3.15
MCU_PA6: J3.4 U3.16 | length 13
  L1 (Signal) w0.2: U3.16 97.65,71.35 96.5,70.2 96.5,63 97.525,61.975 97.708,61.975 97.825,61.858 J3.4
MCU_PA7: J3.5 U3.17 | length 12.8
  L1 (Signal) w0.2: U3.17 98.15,71.15 97.5,70.5 97.5,63.5 99.075,61.925 J3.5
MCU_SWCLK: J2.4 U3.37 | length 14.7
  L1 (Signal) w0.25: U3.37 101.65,79.55 103.5,81.4 110.3,81.4 111.96,83.06 J2.4
MCU_SWDIO: J2.2 U3.34 | length 17.5
  L1 (Signal) w0.25: U3.34 102.958,77.5 102.983,77.475 103.417,77.475 103.442,77.5 105.3,77.5 106.9,79.1 112,79.1 113.3,80.4 113.3,85.545 J2.2
MCU_SWO: J2.6 U3.39 | length 14.2
  L1 (Signal) w0.25: U3.39 100.65,79.75 103.2,82.3 109.3,82.3 110.69,83.69 J2.6
MCU_VCAP1: C7.2 U3.22 | length 2.2
  L1 (Signal) w0.25: 100.65,71.9 U3.22
  L1 (Signal) w0.3: C7.2@100.5,70.3 100.625,70.3 100.65,70.325 100.65,71.9
USB_D_N: J1.2 U3.32 | length 20.6
  L1 (Signal) w0.26: U3.32 103.308,76.5 103.361,76.447 108.402,76.447 109.099,77.143 122.507,77.143 J1.2
USB_D_P: J1.3 U3.33 | length 20.7
  L1 (Signal) w0.26: U3.33 102.565,77 102.583,76.982 103.482,76.982 103.553,76.91 108.21,76.91 108.907,77.607 122.507,77.607 J1.3
VBUS: C1.2 D2.1 FB1.1 J1.1 | length 13.7
  L1 (Signal) w0.45: 120.8,76.4 J1.1
  L1 (Signal) w0.6: FB1.1 111.529,75.671 111.923,75.177 111.987,74.2 C1.2 113.7,74 115,75.3 D2.1 119.875,75.475 120.8,76.4
pads on no net: J1.4 J1.6 J1.7 J1.8 J1.9 J1.10 J1.11 J2. J3.7 J3.8 U2.2 U2.3 U2.4 U2.5 U2.6 U2.7 U2.14 U2.15 U2.16 U2.17 U2.19 U2.21 U2.22 U3.2 U3.3 U3.4 U3.10 U3.11 U3.12 U3.13 U3.18 U3.19 U3.20 U3.21 U3.25 U3.27 U3.28 U3.29 U3.30 U3.31 U3.38 U3.40 U3.41 U3.46

## Polygon pours and split planes (outlines as drawn)
+5V on L1 (Signal) "+5V_L01_P000" (solid, pour order 0): 110.6,73.3 108.9,73.3 108.9,74.7 109.3,76.5 110.6,76.5
GND on L1 (Signal) "GND_L01_P006" (solid, pour order 6): 116.3,72.9 116.3,70 114.2,70 114.2,69.5 112.7,69.5 112.7,69.9 112.2,70.4 110.4,70.4 110.4,66.9 111.2,66.9 111.2,65.5 115.1,65.5 115.1,62.8 111.7,62.8 111.7,64.4 108.9,64.4 108.9,66.9 107.8,66.9 107.8,70.2 109,70.2 109,72.6 113.3,72.6 113.3,72.9
GND on L2 (GND) "GND_L02_P003" (solid, pour order 3): 81,94 cw(c82.25,94) 82.25,95.25 125,95.25 cw(c125,93.75) 126.5,93.75 126.5,56.5 cw(c126,56.5) 126,56 81.5,56 cw(c81.5,56.5) 81,56.5
GND on L3 (GND) "GND_L03_P005" (solid, pour order 5): 81,94 cw(c82.25,94) 82.25,95.25 125,95.25 cw(c125,93.75) 126.5,93.75 126.5,56.5 cw(c126,56.5) 126,56 81.5,56 cw(c81.5,56.5) 81,56.5

## Silkscreen, mask and mechanical layers (free items; w line width, h text height)
Top Overlay:
  drawing of 4 lines, arcs and shapes, not listed
  text "SWD" at 107.054,81.254 h1.52
  text "USB" at 121.654,71.354 h1.52
  text "GPIO" at 94.954,62.054 h1.52
Mechanical 1:
  lines w0.254: 80.7,56.87 ccw(c81.97,56.87) 81.97,55.6 125.63,55.6 ccw(c125.63,56.87) 126.9,56.87 126.9,94.23 ccw(c125.63,94.23) 125.63,95.5 87,95.5 81.97,95.5 ccw(c81.97,94.23) 80.7,94.23 80.7,56.87